# Altium PCB BuckConverters.PcbDoc
Units mil, origin at the board's own origin, x right, y up, seen from the top; angles counter-clockwise.
Board outline 1940 x 2060 mil, 4 copper layers (Top Layer, Layer 1, Layer 2, Bottom Layer), stack 55.441 mil thick; 35 components, 20 nets, 83 pads, 4 vias.
Unrouted connection lines stored in the file: 24.
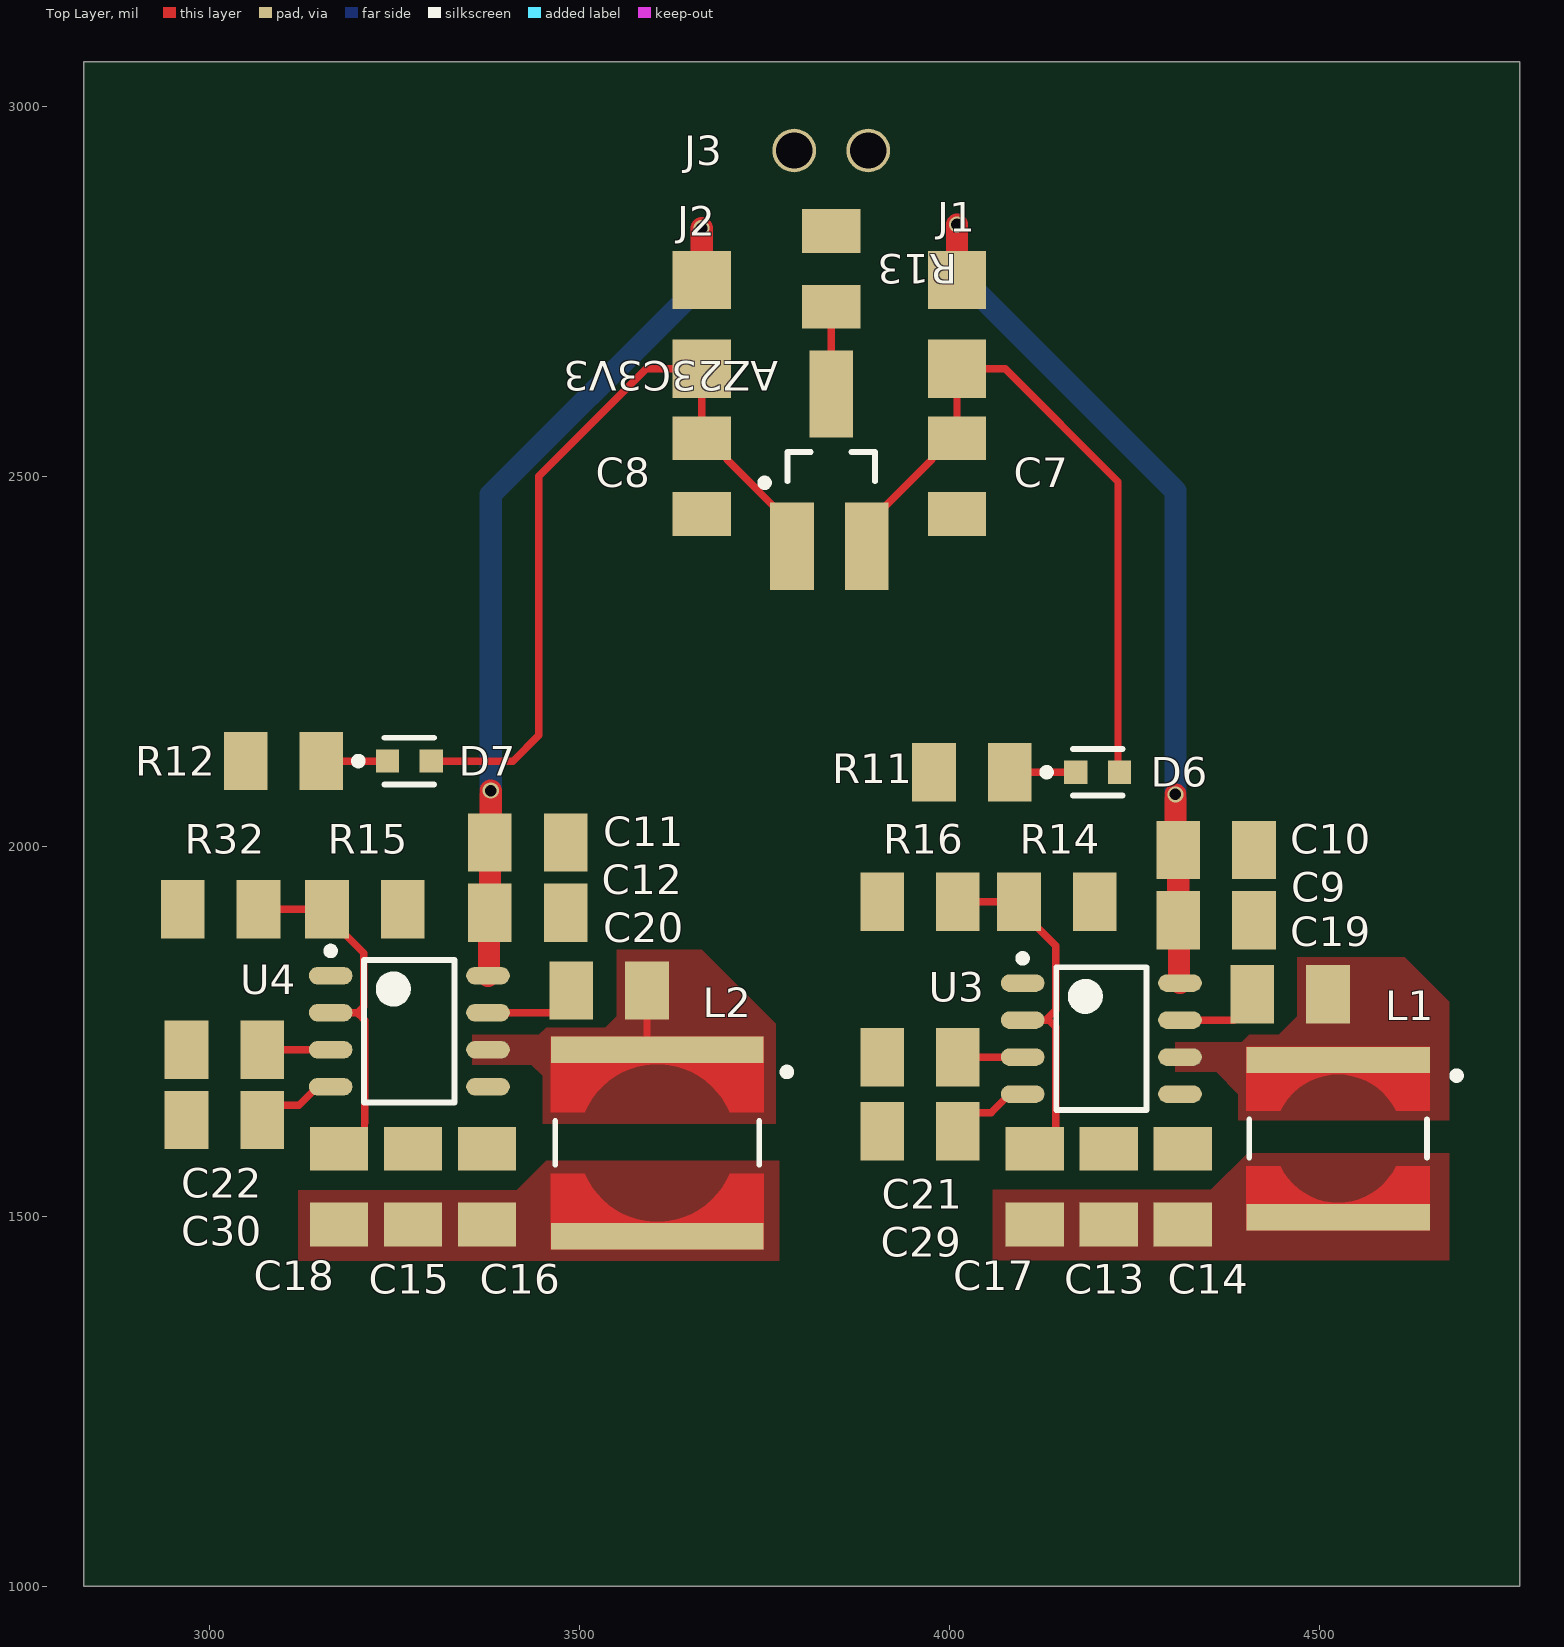
[diagram p0: Top Layer view]
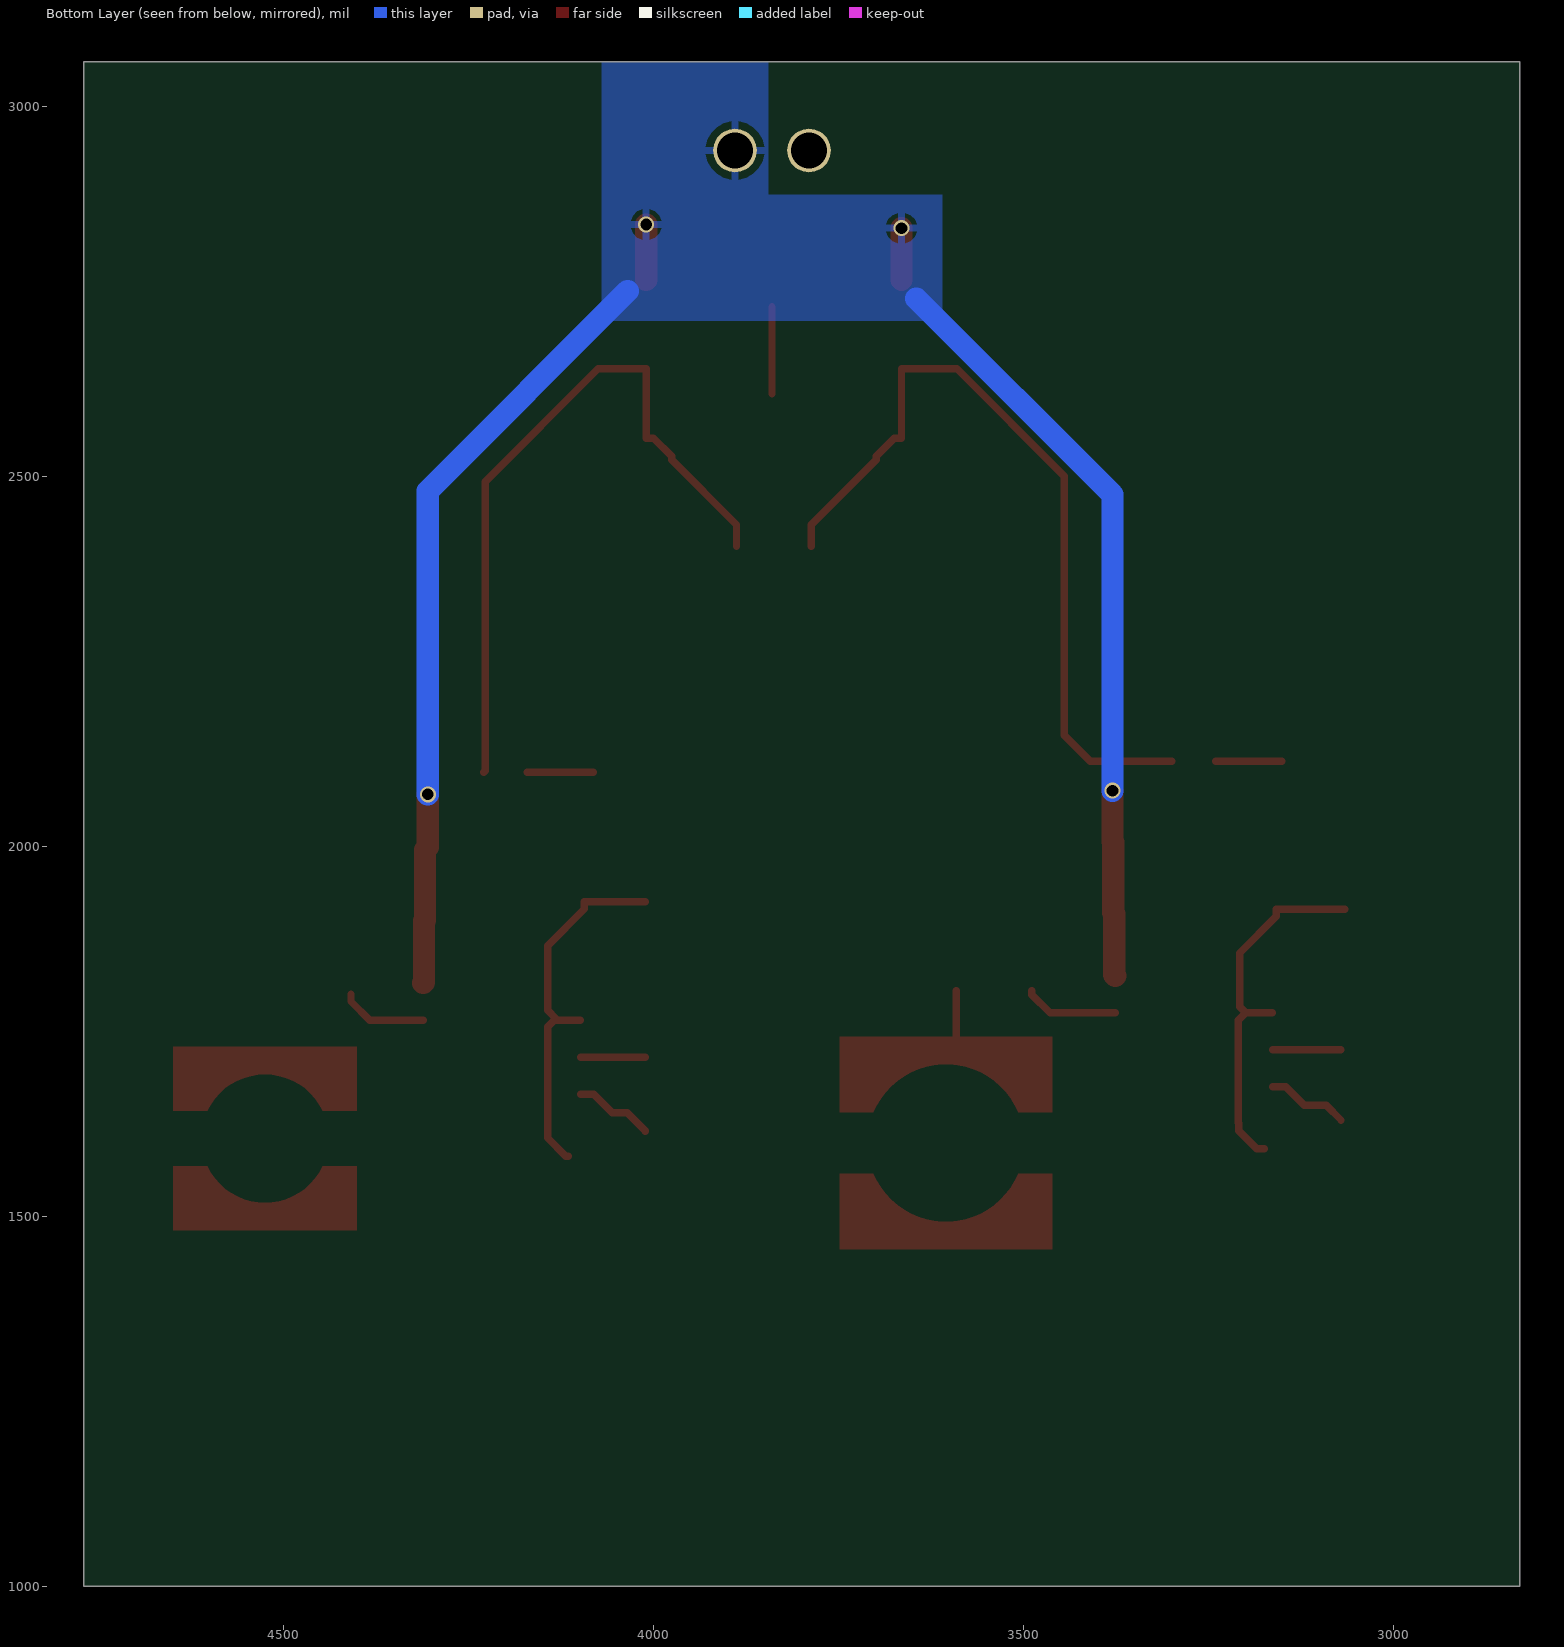
[diagram p1: Bottom Layer view, seen from below]
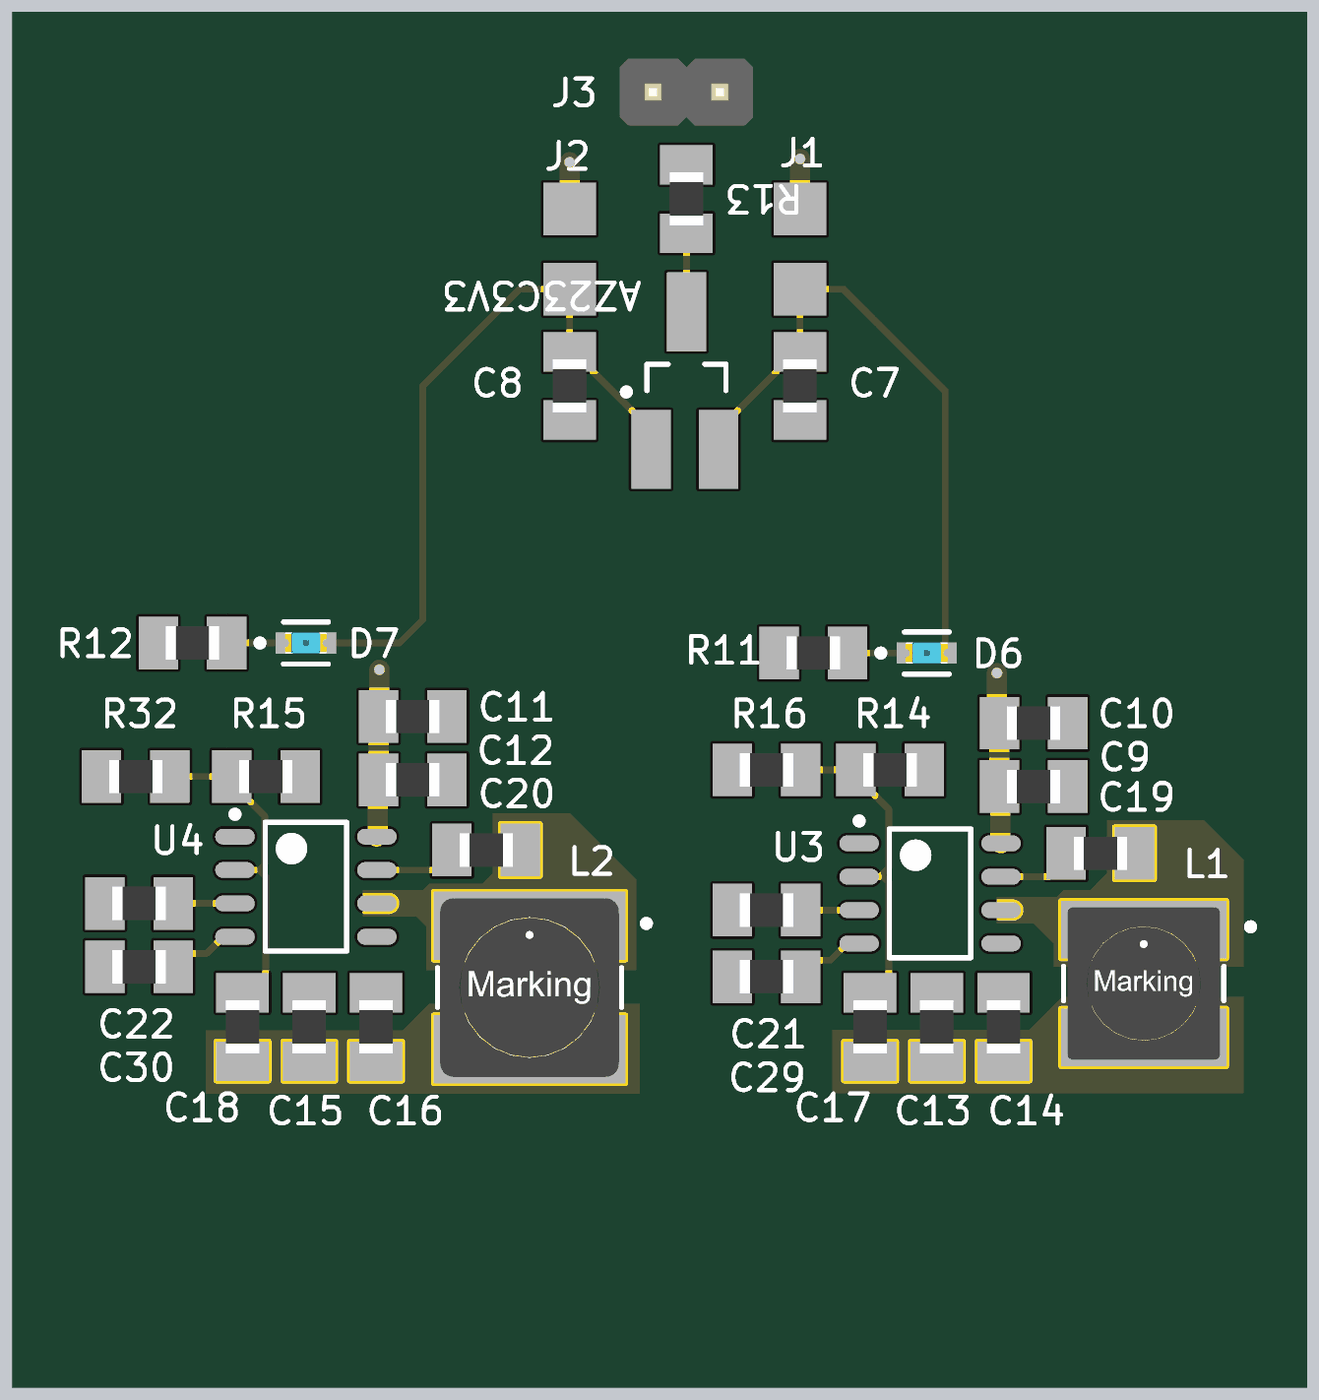
[diagram p2: 3D render of the assembled board from above, using the file's embedded part models]

## Layer stack, top to bottom
Top Solder: solder mask 0.4, Solder Resist, Dk 3.5
Top Layer: signal copper 1.378
Dielectric 2: core 4, Core-009, Dk 4.5
Layer 1: signal copper 1.378
Dielectric 1: dielectric 41.9291, FR-4, Dk 4.8
Layer 2: signal copper 1.378
Dielectric 3: core 4, Core-009, Dk 4.5
Bottom Layer: signal copper 1.378
Bottom Solder: solder mask 0.4, Solder Resist, Dk 3.5

## Board outline
2830,1000 4770,1000 4770,3060 2830,3060

## Design rules (kind name [scope] priority, off if disabled: settings)
Clearance Clearance_1 [OnMid vs OnMid] p1: gap=10 ignorepadtopadclearanceinfootprint=FALSE except(0: Arc-Hole Track-Hole SMDPad-Hole THPad-Hole Via-Hole Fill-Hole Poly-Hole Region-Hole Text-Hole; 4: Arc-Arc Arc-Track Arc-Text Track-Track Track-Text Text-Text; 8: Arc-SMDPad Track-SMDPad SMDPad-Text; 14: Arc-Via Track-Via Via-Text)
Clearance Clearance_2 [(ExistsOnLayer('Top Layer') Or ExistsOnLayer('Bottom Layer')) vs (ExistsOnLayer('Top Layer') Or ExistsOnLayer('Bottom Layer'))] p2: gap=10 ignorepadtopadclearanceinfootprint=FALSE except(0: Arc-Hole Track-Hole SMDPad-Hole THPad-Hole Via-Hole Fill-Hole Poly-Hole Region-Hole Text-Hole; 4: Arc-Arc Arc-Track Arc-Text Track-Track Track-Text Text-Text; 8: Arc-SMDPad Track-SMDPad SMDPad-Text; 14: Arc-Via Track-Via Via-Text)
Clearance [All] p3: gap=10 ignorepadtopadclearanceinfootprint=FALSE except(0: Arc-Hole Track-Hole SMDPad-Hole THPad-Hole Via-Hole Fill-Hole Poly-Hole Region-Hole Text-Hole)
PolygonConnect [All] p1: connectstyle=Relief reliefconductorwidth=10 reliefentries=4 polygonreliefangle="90 Angle" airgapwidth=10
RoutingVias [All] p1: holewidth=15.75 width=21.65 viastyle="Through Hole" minholewidth=15.75 minwidth=21.65 maxholewidth=15.75 maxwidth=21.65
SolderMaskExpansion [All] p1: expansion=4 istentingtop=FALSE
Width [All] p1: maxlimit=100 minlimit=4 preferedwidth=10 midlayer1_minwidth=10 midlayer1_maxwidth=10 midlayer2_minwidth=10 midlayer2_maxwidth=10 minimp=50.000000 maximp=50.000000 favimp=50.000000
30 further rules are at their usual default settings.

## Classes and differential pairs
polygon class Direct: NetC24_2_P

## Components (designator, comment, footprint, x,y, rotation, side; value= is the part's Value field where it differs from the comment)
AZ23C3V3 "SOT23" SOT23 3840,2505 r90 top
C7 "P.N." 0805_R 4010,2500 r270 top
C8 "P.N." 0805_R 3665,2500 r270 top
C9 "P.N." 0805_R 4360,1900 r180 top
C10 "P.N." 0805_R 4360,1995 r180 top
C11 "P.N." 0805_R 3430,2005 r180 top
C12 "P.N." 0805_R 3430,1910 r180 top
C13 "P.N." 0805_R 4215,1540 r90 top
C14 "P.N." 0805_R 4315,1540 r90 top
C15 "P.N." 0805_R 3275,1540 r90 top
C16 "P.N." 0805_R 3375,1540 r90 top
C17 "P.N." 0805_R 4115,1540 r90 top
C18 "P.N." 0805_R 3175,1540 r90 top
C19 "P.N." 0805_R 4460,1800 r180 top
C20 "P.N." 0805_R 3540,1805 r180 top
C21 "P.N." 0805_R 3960,1715 r180 top
C22 "P.N." 0805_R 3020,1725 r180 top
C29 "P.N." 0805_R 3960,1615 r180 top
C30 "P.N." 0805_R 3020,1630 r180 top
D6 "LTST-C191TBKT" FP-LTST-C191TBKT-MFG 4200,2100 r0 top
D7 "LTST-C191TBKT" FP-LTST-C191TBKT-MFG 3270,2115 r0 top
J1 "JUMPER_RECT" JUMPER_RECT 4010,2705 r270 top
J2 "JUMPER_RECT" JUMPER_RECT 3665,2705 r270 top
J3 "HEADER_2POS_MALE" HEADER_2POS_MALE_VERT_2.54MM 3790,2940 r0 top
L1 "744052002" WE-TPC_5818 4525,1605 r0 top
L2 "744062003" WE-TPC_6823 3605,1599.02 r0 top
R11 "P.N." 0805_R 4030,2100 r0 top
R12 "P.N." 0805_R 3100,2115 r0 top
R13 "P.N." 0805_R 3840,2780 r270 top
R14 "P.N." 0805_R 4145,1925 r0 top
R15 "P.N." 0805_R 3210,1915 r0 top
R16 "P.N." 0805_R 3960,1925 r0 top
R32 "P.N." 0805_R 3015,1915 r0 top
U3 "BD9D321EFJ-E2" SOIC127P600X100-8N 4205,1740 r0 top
U4 "BD9D321EFJ-E2" SOIC127P600X100-8N 3270,1750 r0 top

## Footprints (in the part's own frame and the unit in brackets; to place one, negate y for a bottom-side part, rotate by r counter-clockwise, add the part's x,y. Pads: shape width x height; smd on the part's side, far side on the other; paste and mask are expansions set on the pad)
0805_R [mm] "Chip Resistor, 2-Leads, Body 0805, IPC Compliant"
  rect 1.5x2 smd: 1(-1.3,0) 2(1.3,0)
  body extent -1.01,-0.64 1.01,0.64, height 0.51
FP-LTST-C191TBKT-MFG [mm]
  rect 0.8x0.8 smd paste+0 mask+0: 1(-0.75,0) 2(0.75,0)
  silkscreen extent -1.87,-0.8 0.85,0.8, body extent -1.25,-0.55 1.25,0.55, height 0.25
HEADER_2POS_MALE_VERT_2.54MM [mm]
  round 1.5 / inner round 2 / far side round 1.5 hole 1.25: 1(0,0) 2(2.54,0)
  body extent -1.27,-1.27 3.81,1.27, height 8.88
JUMPER_RECT [mm] "Small rectangular jumper"
  rect 2x2 smd: 1(-1.524,0) 2(1.524,0)
  body extent -2.54,-1.02 2.54,1.02
SOIC127P600X100-8N [mm] "SOIC, 8-Leads, Body 4.85x3.85mm, Pitch 1.27mm, IPC Medium Density"
  oval 1.5x0.6 smd: 1(-2.7,1.905) 2(-2.7,0.635) 3(-2.7,-0.635) 4(-2.7,-1.905) 5(2.7,-1.905) 6(2.7,-0.635) 7(2.7,0.635) 8(2.7,1.905)
  silkscreen extent -2.82,-2.45 1.55,2.88, body extent -1.95,-2.45 1.95,2.45, height 1
SOT23 [mm] "SOT23, 3-Leads, Body 2.90x2.50mm, Pitch 1.00mm, IPC Medium Density"
  rect 3x1.5 smd: 1(-2.54,1.346) 2(-2.54,-1.219) 3(2.692,0)
  silkscreen extent -0.48,-1.5 0.7,2.41, body extent -0.7,-1.5 0.7,1.5, height 1.2
WE-TPC_5818 [mm] "Power Inductor, SMD, 2-Leads, body 5.8x5.8mm"
  rect 6.3x0.9 smd paste-403.566 mask-403.566: 1(0,2.7) 2(0,-2.7)
  Top Layer region: 3.15,-0.95 1.984,-0.95 1.984,-0.95 1.374,-1.718 0.491,-2.145 -0.49,-2.145 -1.374,-1.718 -1.984,-0.95 -1.984,-0.95 -3.15,-0.95 -3.15,-0.95 -3.15,-3.15 3.15,-3.15
  Top Layer region: -3.15,0.95 -1.984,0.95 -1.984,0.95 -1.374,1.718 -0.491,2.145 0.49,2.145 1.374,1.718 1.984,0.95 1.984,0.95 3.15,0.95 3.15,0.95 3.15,3.15 -3.15,3.15
  silkscreen extent -3.05,-0.65 4.19,2.28, body extent -2.9,-2.9 2.9,2.9, height 1.8
WE-TPC_6823 [mm] "Power Inductor, SMD, 2-Leads, body 6.8x6.8mm"
  rect 7.3x0.9 smd paste-403.566 mask-403.566: 1(0,3.2) 2(0,-3.2)
  Top Layer region: -3.65,1.05 -3.65,3.65 3.65,3.65 3.65,1.05 3.65,1.05 2.488,1.05 1.745,2.06 0.627,2.626 -0.627,2.626 -1.745,2.06 -2.488,1.05 -2.488,1.05 -2.488,1.05
  Top Layer region: 3.65,-1.05 3.65,-3.65 -3.65,-3.65 -3.65,-1.05 -3.65,-1.05 -2.488,-1.05 -1.745,-2.06 -0.627,-2.626 0.627,-2.626 1.745,-2.06 2.488,-1.05 2.488,-1.05 2.488,-1.05
  silkscreen extent -3.5,-0.75 4.57,2.56, body extent -3.4,-3.4 3.4,3.4, height 2.3

## Part data
C7 C8 C10 C12 C13 C14 C15 C16 C21 C22 C29 C30: library part 0805_C, "Generic 0805 Capacitor", Capacitance=22uF, Dielectric=XR7, Voltage Rating=10V
C9 C11 C19 C20: library part 0805_C, "Generic 0805 Capacitor", Capacitance=100nF, Dielectric=XR7, Voltage Rating=10V
C17 C18: library part 0805_C, "Generic 0805 Capacitor", Capacitance=100pF, Dielectric=XR7, Voltage Rating=10V
D6 D7: library part CMP-22017-000008-1, "LED BLUE CLEAR CHIP SMD", Case Code (Imperial)=0603, Case Code (Metric)=1608, Color=Blue, Forward Current=20mA, Forward Voltage=3.8V, Lens Color=Colorless, Max Operating Temperature=80°C, Max Power Dissipation=75mW, Min Operating Temperature=-20°C, Package Quantity=1, Power Dissipation=76mW, Reverse Voltage=5V, Case/Package=0603, Depth=1.6mm, Dominant Wavelength=475nm, Height=0.55mm, Illumination Color=Blue, Lead Free="Lead Free", Length=0.8mm, Lens Style=Diffused, Lens Transparency=Clear, Luminous Intensity=180mcd, Mount="Surface Mount", Number of Elements=1, Number of LEDs=1, Number of Pins=2, Packaging="Tape and Reel", Radiation Hardening=No, Test Current=20mA, Viewing Angle=130°, Wavelength=468nm, Width=0.8mm
J1 J2: "Small rectangular jumper"
L1: library part CMP-0227-00410-3, Ambient Temperature Range High=95°C, Ambient Temperature Range Low=-40°C, Current Rating=2.4A, DC Resistance (DCR)=30mΩ, Inductance=2.5µH, Inductance Tolerance=30%, Max Operating Temperature=125°C, Self Resonant Frequency=85MHz, Height=1.8mm, Length=5.8mm, Min Operating Temperature=-40°C, NexarPartId=22866863, Number of Pins=2, Packaging="Cut Tape (CT)", RoHS=Compliant, Width=5.8mm
L2: library part CMP-0227-00249-3, Ambient Temperature Range High=95°C, Ambient Temperature Range Low=-40°C, Case Code (Imperial)=2727, Case Code (Metric)=6868, Current Rating=2.8A, DC Resistance (DCR)=20mΩ, Inductance=3.3µH, Inductance Tolerance=30%, Max Operating Temperature=125°C, Saturation Current=2.5A, Self Resonant Frequency=55MHz, Test Frequency=100kHz, Case/Package=2727, Composition=Wirewound, Core Material=Ferrite, Height=2.3mm, Height - Seated (Max)=2.4892mm, Lead Free="Lead Free", Length=6.8mm, Max DC Current=2.8A, Min Operating Temperature=-40°C, Mount="Surface Mount", NexarPartId=24533145, Number of Pins=2, Packaging="Tape & Reel (TR)", REACH SVHC=Unknown, RMS Current (Irms)=2.8A, RoHS=Compliant, Shielding=Shielded, Termination=SMD/SMT, Tolerance=30%, Width=6.8mm
R11 R12: library part 0805_R, "Generic 0805 Resistor", Power Rating=0.5W, Resistance=471R
R13: library part 0805_R, "Generic 0805 Resistor", Power Rating=0.5W, Resistance=182R
R14: library part 0805_R, "Generic 0805 Resistor", Power Rating=0.5W, Resistance=753R
R15: library part 0805_R, "Generic 0805 Resistor", Power Rating=0.5W, Resistance=123R
R16 R32: library part 0805_R, "Generic 0805 Resistor", Power Rating=0.5W, Resistance=223R
U3 U4: library part CMP-019-00049-1, "ICREGBUCKADJ3ASYNC8HTSOP", Max Operating Temperature=85°C, Max Output current=3A, Max Output Voltage=7V, Max Supply Voltage=18V, Min Input Voltage=4.5V, Min Operating Temperature=-40°C, Min Output Voltage=765mV, Package Quantity=2500, Switching Frequency=700kHz, Lead Free="Lead Free", Min Supply Voltage=4.5V, Mounting Technology="Surface Mount", Number of Outputs=1, Operating Supply Voltage=18V, Output Configuration=Positive, Output Current=3A, Output Type=Adjustable, Output Voltage=7V, Packaging="Tape and Reel", Pins=8, Reach SVHC Compliant=Unknown, RoHS Compliant=Yes, Series=-, Synchronous Rectifier=Yes

## Via types
v1: diameter 21.65, hole 15.75, Top Layer to Bottom Layer, 4 vias

## Nets (pads, with @x,y where several pads share a name; then routed paths per layer and width w, separated by ;. In a path a pad name is that pad's centre, name@x,y a point inside that pad or via, vN(x,y) a via of type N, cw(c..) or ccw(c..) an arc to the next point about the centre after c; other vN are vias at no path point)
3V3_EN: AZ23C3V3.2 C7.1 D6.2 J1.2 U3.1 | length 970.3
  Top Layer w10: AZ23C3V3.2 3888,2434.53 3975.63,2522.16 3975.63,2526.65 4000.16,2551.18 C7.1 J1.2 4075,2645 4227.54,2492.46 4227.54,2101.99 D6.2
3V3_smps: C13.1 C14.1 C17.1 L1.2 R14.2
5V0_EN: AZ23C3V3.1 C8.1 D7.2 J2.2 U4.1 | length 1086.3
  Top Layer w10: D7.2 3410,2115 3445,2150 3445,2500 3590,2645 J2.2 C8.1 3674.84,2551.18 3699.37,2526.65 3699.37,2522.16 3787,2434.53 AZ23C3V3.1
5V0_smps: C15.1 C16.1 C18.1 L2.2 R15.2
12VIN: C9.2 C10.2 C11.2 C12.2 J1.1 J2.1 J3.2 U3.8 U4.8 | length 2220.7
  Top Layer w30: U4.8 3377.56,1826.26 3377.56,1908.74 C12.2 C11.2 3380,2006.18 v1(3380,2075) ; J2.1 v1(3665,2835) ; J1.1 v1(4010,2840) ; v1(4305,2070) 4305,1998.82 C10.2 C9.2 4310.06,1898.76 4310.06,1816.24 U3.8
  Bottom Layer w30: v1(3380,2075) 3380,2475 3645,2740 ; 4035,2750 4305,2480 v1(4305,2070)
FB_3V3: C17.2 R14.1 R16.2 U3.2 | length 502.5
  Top Layer w10: R16.2 R14.1 4093.82,1915.16 4143.23,1865.75 4143.23,1778.23 4132.17,1767.17 ; U3.2 4134.33,1765 4143.23,1756.11 4143.23,1605.71 4118.7,1581.18 C17.2@4115,1581.18
FB_5V0: C18.2 R15.1 R32.2 U4.2 | length 497.3
  Top Layer w10: R32.2 R15.1 3158.82,1905.16 3208.23,1855.75 3208.23,1783.23 3200,1775 U4.2 ; C18.2 3184.84,1591.18 3209.37,1615.71 3209.37,1625.55 3210,1626.18 3210,1765 3202.61,1772.39
GND: C7.2 C8.2 C9.1 C10.1 C11.1 C12.1 C13.2 C14.2 C15.2 C16.2 C21.2 C22.2 C29.2 C30.2 R11.1 R12.1 R13.1 R16.1 R32.1 U3.5 U4.5
GND_IN: J3.1
NetAZ23C3V3_3: AZ23C3V3.3 R13.2 | length 117.8
  Top Layer w10: AZ23C3V3.3 R13.2
NetC19_2: C19.2 U3.7 | length 117.8
  Top Layer w10: U3.7 4383.66,1765 4408.82,1790.16 C19.2
NetC20_2: C20.2 U4.7 | length 128.2
  Top Layer w10: U4.7 3464.29,1775 3488.82,1799.53 C20.2
NetC21_1: C21.1 U3.3 | length 87.5
  Top Layer w10: C21.1 U3.3
NetC22_1: C22.1 U4.3 | length 92.5
  Top Layer w10: C22.1 U4.3
NetC29_1: C29.1 U3.4 | length 108.5
  Top Layer w10: C29.1 4011.18,1615.47 4035.71,1640 4055.98,1640 4080.98,1665 U3.4
NetC30_1: C30.1 U4.4 | length 111.2
  Top Layer w10: C30.1 3091.18,1650 3120.98,1650 3145.98,1675 U4.4
NetD6_1: D6.1 R11.2 | length 89.3
  Top Layer w10: R11.2 D6.1
NetD7_1: D7.1 R12.2 | length 89.3
  Top Layer w10: R12.2 D7.1
SW_node_1: C19.1 L1.1 U3.6
SW_node_2: C20.1 L2.1 U4.6 | length 90.4
  Top Layer w10: C20.1 3591.18,1738.7 3603.9,1725.98 L2.1@3610,1725.98

## Polygon pours and split planes (outlines as drawn)
SW_node_1 on Top Layer "NetC24_2_P" (solid, remove dead copper, pour order 3): 4470,1850 4615,1850 4675,1790 4675,1630 4390,1630 4390,1665 4360,1695 4305,1695 4305,1735 4395,1735 4405,1745 4445,1745 4470,1770
SW_node_2 on Top Layer "NetC24_2_P" (solid, remove dead copper, pour order 2): 3550,1860 3665,1860 3765,1760 3765,1625 3450,1625 3450,1690 3435,1705 3355,1705 3355,1745 3445,1745 3455,1755 3535,1755 3550,1770
3V3_smps on Top Layer "NetC24_2_P" (solid, remove dead copper, pour order 1): 4675,1585 4402.54,1585 4353.15,1535.6 4058.15,1535.6 4058.15,1440.6 4675,1440.6
5V0_smps on Top Layer "NetC24_2_P" (solid, remove dead copper, pour order 0): 3770,1575 3455,1575 3415,1535 3120,1535 3120,1440 3770,1440
12VIN on Bottom Layer "NetC24_2_P" (solid, remove dead copper, pour order 4): 3845,3060 4070,3060 4070,2710 3610,2710 3610,2880 3845,2880